# Altium PCB 电子天平.PcbDoc
Units mil, origin at the board's own origin, x right, y up, seen from the top; angles counter-clockwise.
Board outline 6000 x 4000 mil, 2 copper layers (Top Layer, Bottom Layer); 159 components, 109 nets, 516 pads, 0 vias.
Unrouted connection lines stored in the file: 318.
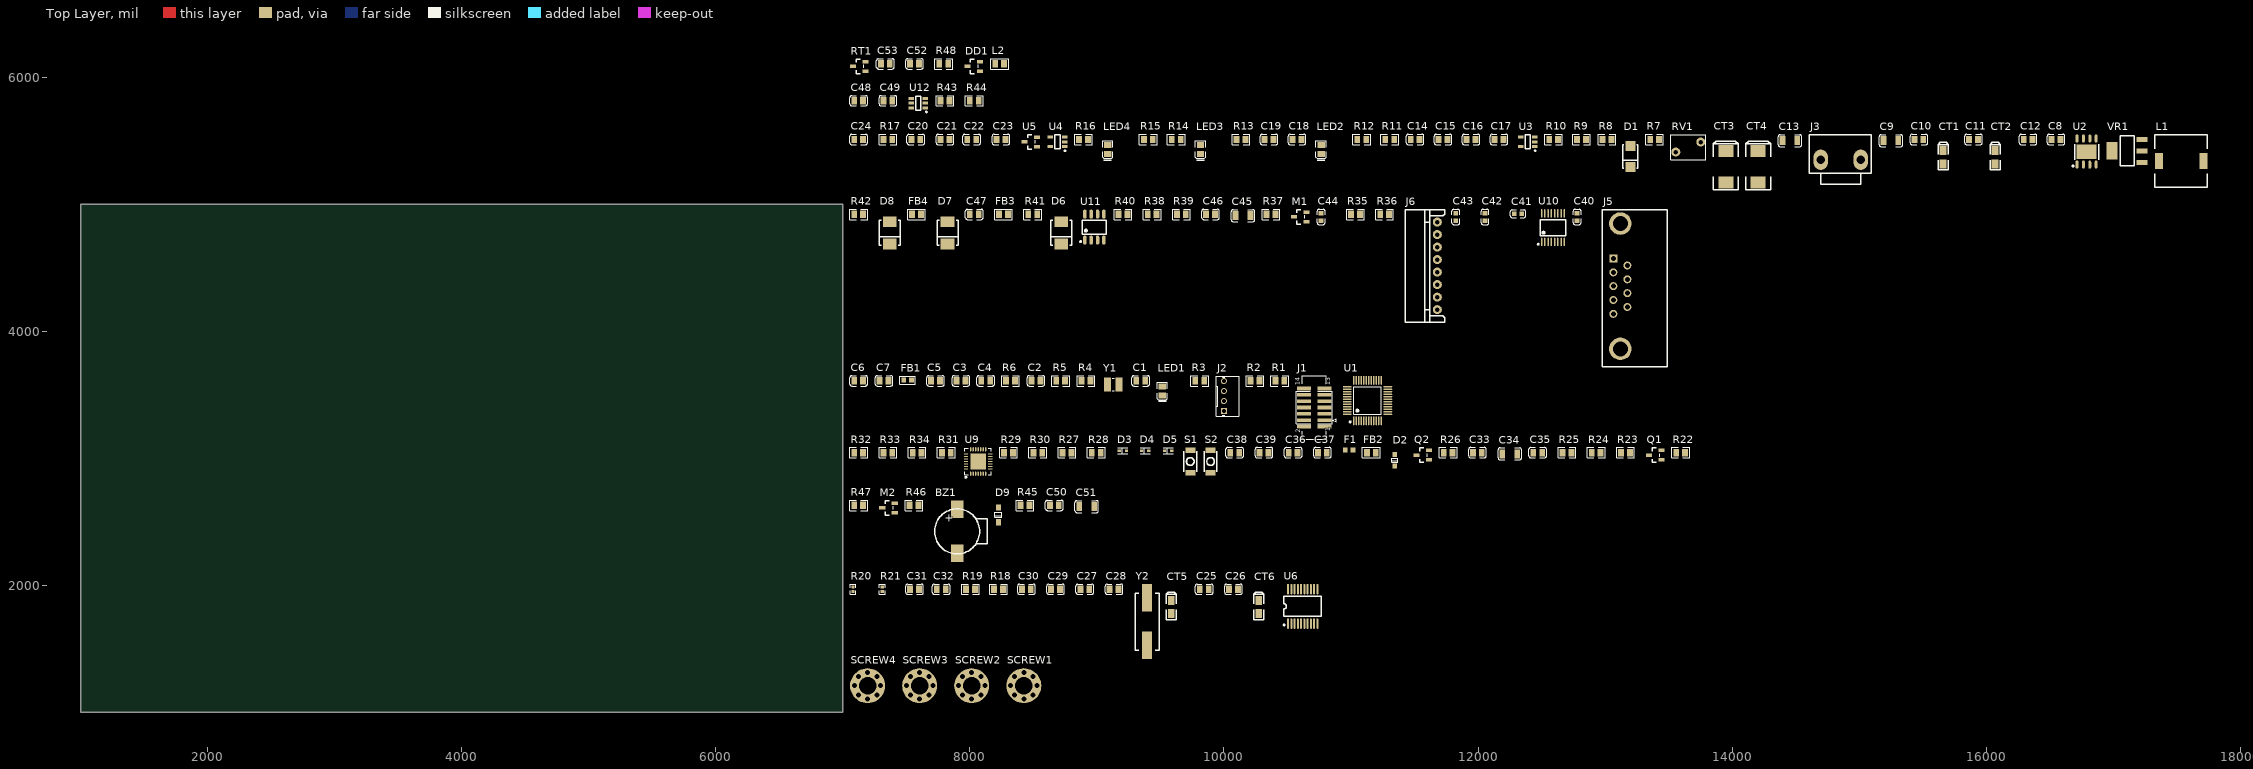
[diagram p0: Top Layer view]
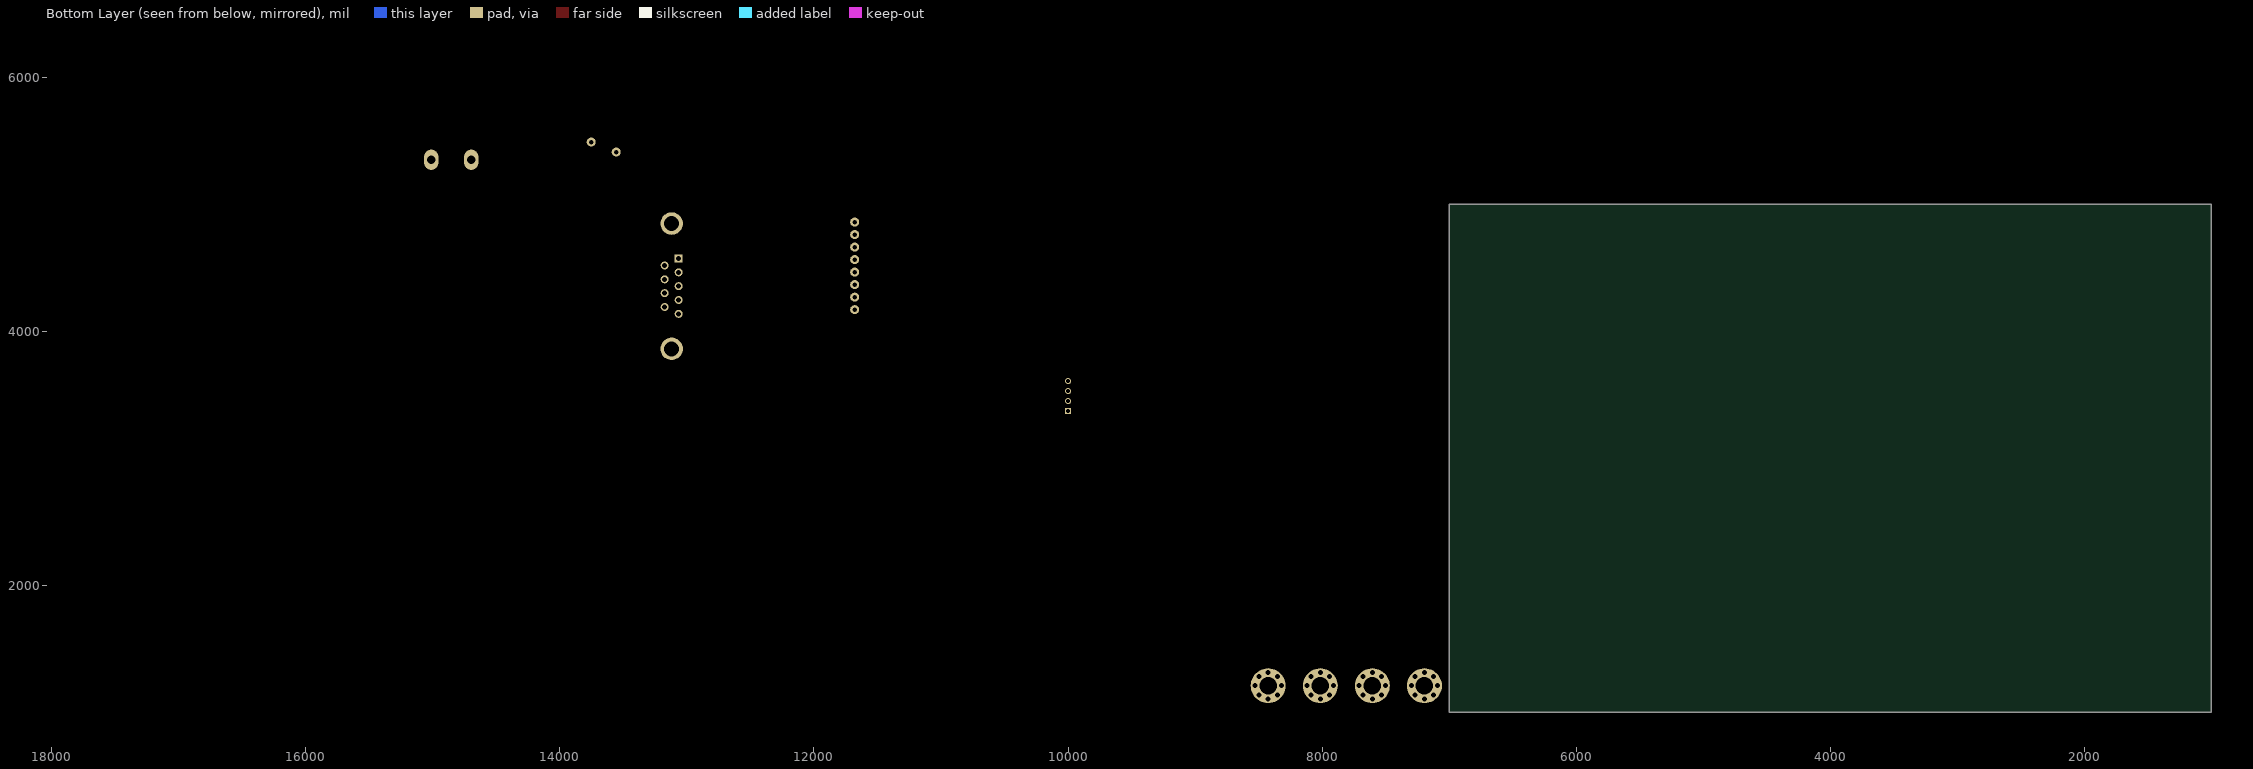
[diagram p1: Bottom Layer view, seen from below]

## Layer stack, top to bottom
Top Layer: signal copper 1.4
Dielectric: dielectric 12.6, FR-4, Dk 4.8
Bottom Layer: signal copper 1.4

## Board outline
1000,1000 7000,1000 7000,5000 1000,5000

## Design rules (kind name [scope] priority, off if disabled: settings)
Clearance Polygon [InPolygon] p1: gap=20
Clearance JLC_Via [IsVia] p2: gap=6
Clearance [All] p3: gap=10
Height [All] p1: minheight=0 maxheight=10000 prefheight=500
HoleSize JLC_HoleSize [All] p1: absolutevalues=TRUE maxlimit=248.03 minlimit=11.81 maxpercent=80.000 minpercent=20.000
MinimumAnnularRing JLC_MinimumAnnularRing [IsVia] p1: minimumring=3
MinimumSolderMaskSliver [All] p1: minsoldermaskwidth=0
PlaneConnect [All] p1: planeconnectstyle=Direct reliefexpansion=20 reliefentries=4 reliefconductorwidth=10 reliefairgap=10
PolygonConnect Via&Fill_Connect [IsVia Or IsFill] p1: connectstyle=Direct reliefconductorwidth=10 reliefentries=4 polygonreliefangle="90 Angle"
PolygonConnect [All] p2: connectstyle=Direct reliefconductorwidth=20 reliefentries=4 polygonreliefangle="90 Angle"
RoomDefinition 温度检测 [InComponentClass('温度检测')] p1: confinementstyle=ConfineIn formatcopy=TRUE lockcomponents=FALSE outline 7045,6015 8315,6015 8315,6255 7045,6255
RoomDefinition 加密芯片 [InComponentClass('加密芯片')] p2: confinementstyle=ConfineIn formatcopy=TRUE lockcomponents=FALSE outline 7045,5710 8150,5710 8150,5965 7045,5965
RoomDefinition 电源 [InComponentClass('电源')] p3: confinementstyle=ConfineIn formatcopy=TRUE lockcomponents=FALSE outline 7045,5085 17755,5085 17755,5660 7045,5660
RoomDefinition RS485&RS232 [InComponentClass('RS485&RS232')] p4: confinementstyle=ConfineIn formatcopy=TRUE lockcomponents=FALSE outline 7045,3710 13500,3710 13500,5070 7045,5070
RoomDefinition MCU [InComponentClass('MCU')] p5: confinementstyle=ConfineIn formatcopy=TRUE lockcomponents=FALSE outline 7045,3140 11335,3140 11335,3760 7045,3760
RoomDefinition ESP32 [InComponentClass('ESP32')] p6: confinementstyle=ConfineIn formatcopy=TRUE lockcomponents=FALSE outline 7045,2830 13710,2830 13710,3195 7045,3195
RoomDefinition Buzzer [InComponentClass('Buzzer')] p7: confinementstyle=ConfineIn formatcopy=TRUE lockcomponents=FALSE outline 7045,2170 9025,2170 9025,2780 7045,2780
RoomDefinition ADC [InComponentClass('ADC')] p8: confinementstyle=ConfineIn formatcopy=TRUE lockcomponents=FALSE outline 7045,1410 10780,1410 10780,2120 7045,2120
RoomDefinition 0_电子天平 [InComponentClass('0_电子天平')] p9: confinementstyle=ConfineIn formatcopy=TRUE lockcomponents=FALSE outline 7045,1060 8630,1060 8630,1460 7045,1460
RoutingVias JLC_RoutingVias [All] p1: holewidth=15.75 width=27.56 viastyle="Through Hole" minholewidth=11.81 minwidth=23.62 maxholewidth=248.03 maxwidth=275.59
ShortCircuit "Solder Bridge" [(InComponentClass('SB'))] p1: allowed=TRUE
ShortCircuit Screw [(InComponentClass('SCREW'))] p2: allowed=TRUE
ShortCircuit [All] p3: allowed=FALSE
SilkToSilkClearance [All] p1: silktosilkclearance=0
SilkscreenOverComponentPads [IsPad] p1: minsilkscreentomaskgap=0
SolderMaskExpansion [All] p1: expansion=4
Width Polygon_width [InPolygon] p1: maxlimit=20 minlimit=6 preferedwidth=10
Width [All] p2: maxlimit=200 minlimit=6 preferedwidth=10
21 further rules are at their usual default settings.

## Classes and differential pairs
component class 温度检测: C52 C53 DD1 L2 R48 RT1
component class 加密芯片: C48 C49 R43 R44 U12
component class 电源: C8 C9 C10 C11 C12 C13 C14 C15 C16 C17 C18 C19 C20 C21 C22 C23 C24 CT1 CT2 CT3 CT4 D1 J3 L1 LED2 LED3 LED4 R7 R8 R9 R10 R11 R12 R13 R14 R15 R16 R17 RV1 U2 U3 U4 U5 VR1
component class RS485&RS232: C40 C41 C42 C43 C44 C45 C46 C47 D6 D7 D8 FB3 FB4 J5 J6 J7 M1 R35 R36 R37 R38 R39 R40 R41 R42 U10 U11
component class MCU: C1 C2 C3 C4 C5 C6 C7 FB1 J1 J2 LED1 R1 R2 R3 R4 R5 R6 U1 Y1
component class ESP32: C33 C34 C35 C36 C37 C38 C39 D2 D3 D4 D5 F1 FB2 Q1 Q2 R22 R23 R24 R25 R26 R27 R28 R29 R30 R31 R32 R33 R34 S1 S2 U7 U8 U9
component class Buzzer: BZ1 C50 C51 D9 M2 R45 R46 R47
component class ADC: C25 C26 C27 C28 C29 C30 C31 C32 CT5 CT6 J4 R18 R19 R20 R21 U6 Y2
component class 0_电子天平: SCREW1 SCREW2 SCREW3 SCREW4

## Components (designator, comment, footprint, x,y, rotation, side; value= is the part's Value field where it differs from the comment)
BZ1 "KLJ-9032-3627" BUZZER_SMD1 7900,2425 r0 top
C1 "15pF ±5% 50V" LC-0805_C 9345,3610 r0 top
C2 "15pF ±5% 50V" LC-0805_C 8520,3610 r0 top
C3 "4.7uF ±10% 25V" LC-0805_C 7930,3610 r0 top
C4 "100nF" LC-0805_C 8125,3610 r0 top
C5 "100nF" LC-0805_C 7730,3610 r0 top
C6 "100nF" LC-0805_C 7125,3610 r0 top
C7 "1uF ±10% 25V" LC-0805_C 7325,3610 r0 top
C8 "10nF" LC-0805_C 16550,5510 r0 top
C9 "10uF ±10% 50V" LC-1206_C 15250,5500 r0 top
C10 "100nF" LC-0805_C 15470,5510 r0 top
C11 "100nF" LC-0805_C 15900,5510 r0 top
C12 "100nF" LC-0805_C 16330,5510 r0 top
C13 "100nF" LC-1206_C 14455,5500 r0 top
C14 "1uF" LC-0805_C 11505,5510 r0 top
C15 "100nF" LC-0805_C 11725,5510 r0 top
C16 "4.7uF" LC-0805_C 11945,5510 r0 top
C17 "100nF" LC-0805_C 12165,5510 r0 top
C18 "100pF" LC-0805_C 10575,5510 r0 top
C19 "100nF" LC-0805_C 10355,5510 r0 top
C20 "1uF" LC-0805_C 7575,5510 r0 top
C21 "100nF" LC-0805_C 7805,5510 r0 top
C22 "4.7uF" LC-0805_C 8015,5510 r0 top
C23 "100nF" LC-0805_C 8245,5510 r0 top
C24 "100pF" LC-0805_C 7125,5510 r0 top
C25 "100nF" LC-0805_C 9845,1970 r0 top
C26 "100nF" LC-0805_C 10075,1970 r0 top
C27 "4.7uF" LC-0805_C 8905,1970 r0 top
C28 "100nF" LC-0805_C 9135,1970 r0 top
C29 "10nF" LC-0805_C 8675,1970 r0 top
C30 "4.7nF" LC-0805_C 8445,1970 r0 top
C31 "10nF" LC-0805_C 7565,1970 r0 top
C32 "22nF" LC-0805_C 7775,1970 r0 top
C33 "100nF" LC-0805_C 11995,3045 r0 top
C34 "22uF" LC-1206_C 12250,3035 r0 top
C35 "100nF" LC-0805_C 12470,3045 r0 top
C36 "100nF" LC-0805_C 10545,3045 r0 top
C37 "NC" LC-0805_C 10775,3045 r0 top
C38 "4.7uF ±10% 25V" LC-0805_C 10085,3045 r0 top
C39 "100nF" LC-0805_C 10315,3045 r0 top
C40 "100nF ±10% 50V" LC-0603_C 12780,4900 r90 top
C41 "100nF ±10% 50V" LC-0603_C 12315,4925 r0 top
C42 "100nF ±10% 50V" LC-0603_C 12055,4900 r90 top
C43 "100nF ±10% 50V" LC-0603_C 11825,4900 r90 top
C44 "100nF ±10% 50V" LC-0603_C 10765,4900 r90 top
C45 "10uF ±10% 50V" LC-1206_C 10150,4910 r0 top
C46 "100nF ±10% 50V" LC-0805_C 9895,4920 r0 top
C47 "4.7nF ±10% 50V" LC-0805_C 8035,4920 r0 top
C48 "100nF" LC-0805_C 7125,5815 r0 top
C49 "10uF" LC-0805_C 7355,5815 r0 top
C50 "100nF" LC-0805_C 8665,2630 r0 top
C51 "10uF" LC-1206_C 8920,2620 r0 top
C52 "100nF" LC-0805_C 7565,6105 r0 top
C53 "100nF" LC-0805_C 7335,6105 r0 top
CT1 "10uF ±10% 16V" LC-CASE-A_3216 15660,5370 r90 top
CT2 "10uF ±10% 16V" LC-CASE-A_3216 16070,5370 r90 top
CT3 "593D157X0010D2TE3" LC-CASE-D_7343 13950,5295 r90 top
CT4 "593D157X0010D2TE3" LC-CASE-D_7343 14205,5295 r90 top
CT5 "10uF" LC-CASE-A_3216 9585,1830 r90 top
CT6 "10uF" LC-CASE-A_3216 10275,1830 r90 top
D1 "B340A-13-F" LC-SMA(DO-214AC)_S1 13200,5375 r90 top
D2 "BAT60JFILM" LC-SOD-323 11345,2985 r90 top
D3 "LESD5D5.0CT1G" LC-SOD-523 9205,3060 r0 top
D4 "LESD5D5.0CT1G" LC-SOD-523 9380,3060 r0 top
D5 "LESD5D5.0CT1G" LC-SOD-523 9560,3060 r0 top
D6 "P6SMB6.8CA" LC-SMB(DO-214AA)_S1 8720,4775 r90 top
D7 "P6SMB6.8CA" LC-SMB(DO-214AA)_S1 7825,4775 r90 top
D8 "P6SMB6.8CA" LC-SMB(DO-214AA)_S1 7370,4775 r90 top
D9 "1N4148W" LC-SOD-123 8225,2555 r90 top
DD1 "BAV99-7-F" LC-SOT-23(SOT-23-3) 8030,6085 r0 top
F1 "MF-FSMF050X-2" LC-0603 10985,3065 r0 top
FB1 "FCM1608KF-601T03" LC-0603_L 7510,3615 r0 top
FB2 "MH2029-300Y" LC-0805_L 11160,3045 r0 top
FB3 "100R/100M" LC-0805_L 8265,4920 r0 top
FB4 "100R/100M" LC-0805_L 7580,4920 r0 top
J1 "STDC14" CON-FTSH-107-01-L-DV-K 10710,3400 r90 top
J2 "SWD" CON-PH2.0-4P-DIP 10000,3490 r90 top
J3 "POWER IN" CON-VH7.92-2P 14855,5350 r0 top
J5 "Printer" CON-DB9_Female 13120,4355 r90 top
J6 "LCD" CON-A2505WR-8P 11680,4515 r90 top
L1 "CDRH104RNP-150NC" L-CDRH104R 17535,5340 r0 top
L2 "MLF2012A1R0JT000" LC-0805_L 8235,6105 r0 top
LED1 "STATUS" LC-0805_LED_S1 9515,3530 r90 top
LED2 "+12V" LC-0805_LED_S1 10765,5430 r90 top
LED3 "+6V" LC-0805_LED_S1 9815,5430 r90 top
LED4 "+3.3V" LC-0805_LED_S1 9085,5430 r90 top
M1 "AO3400A" LC-SOT-23(SOT-23-3) 10600,4900 r0 top
M2 "AO3400A" LC-SOT-23(SOT-23-3) 7360,2610 r0 top
Q1 "SS8050 Y1" LC-SOT-23(SOT-23-3) 13395,3025 r0 top
Q2 "SS8050 Y1" LC-SOT-23(SOT-23-3) 11565,3025 r0 top
R1 "0Ω" LC-0805_R 10440,3610 r0 top
R2 "0Ω" LC-0805_R 10245,3610 r0 top
R3 "4.7KΩ" LC-0805_R 9810,3610 r0 top
R4 "1MΩ" LC-0805_R 8915,3610 r0 top
R5 "10KΩ" LC-0805_R 8715,3610 r0 top
R6 "0Ω" LC-0805_R 8320,3610 r0 top
R7 "100KΩ" LC-0805_R 13390,5510 r0 top
R8 "10KΩ" LC-0805_R 13015,5510 r0 top
R9 "56KΩ" LC-0805_R 12815,5510 r0 top
R10 "2.55KΩ" LC-0805_R 12595,5510 r0 top
R11 "768Ω ±1%" LC-0805_R 11305,5510 r0 top
R12 "4.7KΩ" LC-0805_R 11085,5510 r0 top
R13 "1.37KΩ" LC-0805_R 10135,5510 r0 top
R14 "0Ω" LC-0805_R 9625,5510 r0 top
R15 "470Ω" LC-0805_R 9405,5510 r0 top
R16 "1KΩ" LC-0805_R 8895,5510 r0 top
R17 "1KΩ" LC-0805_R 7355,5510 r0 top
R18 "300Ω" LC-0805_R 8225,1970 r0 top
R19 "300Ω" LC-0805_R 8005,1970 r0 top
R20 "0Ω" LC-0402_R 7080,1970 r90 top
R21 "0Ω" LC-0402_R 7310,1970 r90 top
R22 "10KΩ" LC-0805_R 13595,3045 r0 top
R23 "0Ω" LC-0805_R 13160,3045 r0 top
R24 "10KΩ" LC-0805_R 12930,3045 r0 top
R25 "0Ω" LC-0805_R 12700,3045 r0 top
R26 "10KΩ" LC-0805_R 11765,3045 r0 top
R27 "5.1KΩ" LC-0805_R 8765,3045 r0 top
R28 "5.1KΩ" LC-0805_R 8995,3045 r0 top
R29 "0Ω" LC-0805_R 8305,3045 r0 top
R30 "0Ω" LC-0805_R 8535,3045 r0 top
R31 "22.1KΩ" LC-0805_R 7815,3045 r0 top
R32 "47.5KΩ" LC-0805_R 7125,3045 r0 top
R33 "2KΩ" LC-0805_R 7355,3045 r0 top
R34 "NC" LC-0805_R 7585,3045 r0 top
R35 "10KΩ ±1%" LC-0805_R 11035,4920 r0 top
R36 "10KΩ ±1%" LC-0805_R 11265,4920 r0 top
R37 "10KΩ ±1%" LC-0805_R 10370,4920 r0 top
R38 "10KΩ ±1%" LC-0805_R 9435,4920 r0 top
R39 "10KΩ ±1%" LC-0805_R 9665,4920 r0 top
R40 "4.7KΩ ±1%" LC-0805_R 9205,4920 r0 top
R41 "120Ω ±1%" LC-0805_R 8495,4920 r0 top
R42 "4.7KΩ ±1%" LC-0805_R 7125,4920 r0 top
R43 "4.7KΩ ±1%" LC-0805_R 7805,5815 r0 top
R44 "4.7KΩ ±1%" LC-0805_R 8035,5815 r0 top
R45 "0Ω ±1%" LC-0805_R 8435,2630 r0 top
R46 "10Ω ±1%" LC-0805_R 7560,2630 r0 top
R47 "10KΩ ±1%" LC-0805_R 7125,2630 r0 top
R48 "2.2KΩ" LC-0805_R 7795,6105 r0 top
RT1 "KTY82/220" LC-SOT-23(SOT-23-3) 7130,6085 r0 top
RV1 "V18ZA05P" RV-V18ZA05P 13655,5450 r0 top
S1 "TS342A2P-WZ" SW-REST-KEY 9735,2975 r90 top
S2 "TS342A2P-WZ" SW-REST-KEY 9895,2975 r90 top
SCREW1 "" SCREW_M3 8425,1210 r0 top
SCREW2 "" SCREW_M3 8015,1210 r0 top
SCREW3 "" SCREW_M3 7605,1210 r0 top
SCREW4 "" SCREW_M3 7195,1210 r0 top
U1 "STM32G071CBT6" LC-LQFP-48_7x7x05P 11130,3455 r0 top
U2 "TPS5430DDAR" LC-SOP-8_EP_150mil 16790,5415 r0 top
U3 "AP2210K-5.0TRG1" LC-SOT-23-5 12390,5490 r0 top
U4 "AP2210K-5.0TRG1" LC-SOT-23-5 8690,5490 r0 top
U5 "TLV431BQDBZR" LC-SOT-23(SOT-23-3) 8480,5490 r0 top
U6 "CS5530-ISZR" LC-SSOP-20_208mil 10620,1835 r0 top
U9 "CP2102N-A01-GQFN28R" LC-QFN-28_5x5x05P 8065,2975 r0 top
U10 "SP3232EEY-L/TR" LC-TSSOP-16 12590,4815 r0 top
U11 "SP3485EN-L/TR" LC-SOIC-8_150mil 8980,4820 r0 top
U12 "GEN-FA" LC-SOT-23-6 7595,5795 r0 top
VR1 "AMS1117-3.3" LC-SOT-223 17110,5420 r0 top
Y1 "8MHz" 3225_XT_2P 9130,3580 r0 top
Y2 "49MD-4.9152-20-10-10/B" LC-HC-49SMD 9395,1715 r90 top

## Footprints (in the part's own frame and the unit in brackets; to place one, negate y for a bottom-side part, rotate by r counter-clockwise, add the part's x,y. Pads: shape width x height; smd on the part's side, far side on the other; paste and mask are expansions set on the pad)
3225_XT_2P [mm] "2脚贴片晶振-8MHz"
  rect 1.4x2.8 smd: 1(-1.15,0) 2(1.15,0)
  silkscreen extent -0.2,-1.24 0.2,1.25, body extent -1.75,-1.24 1.75,1.25, height 0.55
BUZZER_SMD1 [mm] "SMD 10.5*9*3.2  侧发声无源蜂鸣器"
  rect 2.5x3.5 smd: 1(0,4.4) 2(0,-4.4)
  silkscreen extent -4.5,-4.5 6,4.5
CON-A2505WR-8P [mm] "间距2.5mm  90°弯针 插件连接器"
  round 1.8 hole 0.9: 1(8.75,0) 2(6.25,0) 3(3.75,0) 4(1.25,0) 5(-1.25,0) 6(-3.75,0) 7(-6.25,0) 8(-8.75,0)
  silkscreen extent -11.25,-1.45 11.25,6.45
CON-DB9_Female [mm] "DB9母头座子"
  rect 1.6x1.6 hole 1: 1(5.537,1.397)
  round 1.6 hole 1: 2(2.769,1.397) 3(0,1.397) 4(-2.769,1.397) 5(-5.537,1.397) 6(4.14,-1.397) 7(1.372,-1.397) 8(-1.397,-1.397) 9(-4.166,-1.397)
  round 4.5 hole 3: 10(-12.522,0) 11(12.522,0)
  silkscreen extent -16.1,-9.37 15.29,3.58
CON-FTSH-107-01-L-DV-K [mm] "STLINK-V3  STDC14调试接口"
  round 0 hole 1.19 unplated mask+0.05: 0(-5.445,0) 0(5.445,0)
  round 0 hole 0.97 unplated mask+0.05: 0(-3.175,0) 0(3.175,0)
  rect 0.74x2.79 smd mask+0.05: 1(-3.81,-2.032) 2(-3.81,2.032) 3(-2.54,-2.032) 4(-2.54,2.032) 5(-1.27,-2.032) 6(-1.27,2.032) 7(0,-2.032) 8(0,2.032) 9(1.27,-2.032) 10(1.27,2.032) 11(2.54,-2.032) 12(2.54,2.032) 13(3.81,-2.032) 14(3.81,2.032)
  silkscreen extent -6.3,-4.38 6.3,3.6
CON-PH2.0-4P-DIP [mm] "插座 1*4P 2mm 直针 插件"
  rect 1.2x1.2 hole 0.8: 1(-3,0)
  round 1.2 hole 0.8: 2(-1,0) 3(1,0) 4(3,0)
  silkscreen extent -4,-3 4,1.5
CON-VH7.92-2P [mil]
  oval 112.5x160 hole 64.96: 1(-157.48,0) 2(157.48,0)
  silkscreen extent -246,-192 241,197
L-CDRH104R [mm] "SMD,  10.5x10.3x4mm,  功率电感"
  rect 1.6x3.2 smd: 1(-4.45,0) 2(4.45,0)
  silkscreen extent -5.25,-5.25 5.25,5.25
LC-0402_R [mm]
  rect 0.6x0.65 smd mask+0.051: 1(-0.425,0) 2(0.425,0)
  silkscreen extent -0.97,-0.58 0.97,0.58, body extent -0.57,-0.27 0.58,0.28, height 0.41
LC-0603 [mm]
  rect 0.93x0.98 smd: 1(-0.77,0) 2(0.77,0)
LC-0603_C [mm]
  rect 0.93x0.98 smd: 1(-0.77,0) 2(0.77,0)
  silkscreen extent -1.53,-0.79 1.54,0.79, body extent -0.8,-0.4 0.8,0.4, height 0.3
LC-0603_L [mm]
  rect 0.93x0.98 smd: 1(-0.77,0) 2(0.77,0)
  silkscreen extent -1.53,-0.79 1.54,0.79, body extent -0.82,-0.41 0.83,0.41, height 0.46
LC-0805_C [mm]
  rect 1.16x1.47 smd: 1(-0.89,0) 2(0.89,0)
  silkscreen extent -1.77,-1.04 1.77,1.04, body extent -1,-0.62 1,0.63, height 0.77
LC-0805_L [mm]
  rect 1.16x1.47 smd: 1(-0.89,0) 2(0.89,0)
  silkscreen extent -1.77,-1.04 1.77,1.03, body extent -1.02,-0.64 1.03,0.64, height 0.6
LC-0805_LED_S1 [mm]
  rect 1.16x1.47 smd: A(0.89,0) K(-0.89,0)
  silkscreen extent -2.24,-1.04 1.77,1.03, body extent -1.01,-0.63 1.01,0.62, height 1.1
LC-0805_R [mm]
  rect 1.16x1.47 smd: 1(-0.89,0) 2(0.89,0)
  silkscreen extent -1.77,-1.04 1.77,1.03, body extent -1,-0.62 1,0.63, height 0.49
LC-1206_C [mm]
  rect 1.13x1.8 smd: 1(-1.49,0) 2(1.49,0)
  silkscreen extent -2.36,-1.2 2.35,1.2, body extent -1.6,-0.81 1.6,0.79, height 1
LC-CASE-A_3216 [mm]
  rect 1.8x1.35 smd: 1(1.31,0) 2(-1.31,0)
  silkscreen extent -2.54,-1 2.97,1, body extent -1.7,-0.84 1.7,0.84, height 1.71
LC-CASE-D_7343 [mm]
  rect 2.4x3 smd: 1(3.12,0) 2(-3.12,0)
  silkscreen extent -4.65,-2.5 5.1,2.5, body extent -3.7,-2.23 3.7,2.22, height 3.01
LC-HC-49SMD [mm]
  rect 5.5x2 smd: 1(-4.75,0) 2(4.75,0)
  silkscreen extent -5.7,-2.4 5.7,2.4, body extent -6.7,-2.46 6.7,2.44, height 4
LC-LQFP-48_7x7x05P [mm]
  oval 0.28x1.8 smd mask+0.051: 1(-2.75,-4.05) 2(-2.25,-4.05) 3(-1.75,-4.05) 4(-1.25,-4.05) 5(-0.75,-4.05) 6(-0.25,-4.05) 7(0.25,-4.05) 8(0.75,-4.05) 9(1.25,-4.05) 10(1.75,-4.05) 11(2.25,-4.05) 12(2.75,-4.05) 25(2.75,4.05) 26(2.25,4.05) 27(1.75,4.05) 28(1.25,4.05) 29(0.75,4.05) 30(0.25,4.05) 31(-0.25,4.05) 32(-0.75,4.05) 33(-1.25,4.05) 34(-1.75,4.05) 35(-2.25,4.05) 36(-2.75,4.05)
  oval 1.8x0.28 smd mask+0.051: 13(4.05,-2.75) 14(4.05,-2.25) 15(4.05,-1.75) 16(4.05,-1.25) 17(4.05,-0.75) 18(4.05,-0.25) 19(4.05,0.25) 20(4.05,0.75) 21(4.05,1.25) 22(4.05,1.75) 23(4.05,2.25) 24(4.05,2.75) 37(-4.05,2.75) 38(-4.05,2.25) 39(-4.05,1.75) 40(-4.05,1.25) 41(-4.05,0.75) 42(-4.05,0.25) 43(-4.05,-0.25) 44(-4.05,-0.75) 45(-4.05,-1.25) 46(-4.05,-1.75) 47(-4.05,-2.25) 48(-4.05,-2.75)
  silkscreen extent -3.6,-4.42 2.75,2.75
LC-QFN-28_5x5x05P [mm]
  rect 3.13x3.13 smd mask+0.051: 0(0,0)
  oval 0.28x0.85 smd mask+0.051: 1(-1.5,-2.425) 2(-1,-2.425) 3(-0.5,-2.425) 4(0,-2.425) 5(0.5,-2.425) 6(1,-2.425) 7(1.5,-2.425) 15(1.5,2.425) 16(1,2.425) 17(0.5,2.425) 18(0,2.425) 19(-0.5,2.425) 20(-1,2.425) 21(-1.5,2.425)
  oval 0.85x0.28 smd mask+0.051: 8(2.425,-1.5) 9(2.425,-1) 10(2.425,-0.5) 11(2.425,0) 12(2.425,0.5) 13(2.425,1) 14(2.425,1.5) 22(-2.425,1.5) 23(-2.425,1) 24(-2.425,0.5) 25(-2.425,0) 26(-2.425,-0.5) 27(-2.425,-1) 28(-2.425,-1.5)
  silkscreen extent -2.65,-3.3 2.65,2.65
LC-SMA(DO-214AC)_S1 [mm]
  rect 2x2 smd: 1(2.1,0) 2(-2.1,0)
  silkscreen extent -2.35,-1.5 2.35,1.5
LC-SMB(DO-214AA)_S1 [mil]
  rect 85x107.99 smd: 1(87.01,0) 2(-87.01,0)
  silkscreen extent -98,-83 98,83
LC-SOD-123 [mm]
  rect 1.25x1 smd: 1(1.475,0) 2(-1.475,0)
  silkscreen extent -0.5,-0.7 0.5,0.7, body extent -1.85,-0.77 1.85,0.78, height 1.35
LC-SOD-323 [mm]
  rect 1x0.83 smd: 1(1.18,0) 2(-1.18,0)
  silkscreen extent -0.4,-0.6 0.4,0.6, body extent -1.35,-0.63 1.35,0.63, height 1.1
LC-SOD-523 [mm]
  rect 0.64x0.5 smd: 1(0.73,0) 2(-0.73,0)
  silkscreen extent -1,-0.6 1,0.6, body extent -0.8,-0.4 0.8,0.4, height 0.7
LC-SOIC-8_150mil [mm]
  oval 0.7x1.8 smd: 1(-1.905,-2.6) 2(-0.635,-2.6) 3(0.635,-2.6) 4(1.905,-2.6) 5(1.905,2.6) 6(0.635,2.6) 7(-0.635,2.6) 8(-1.905,2.6)
  silkscreen extent -2.9,-3.05 2.4,1.4
LC-SOP-8_EP_150mil [mm]
  rect 4x2.9 smd: 0(0,0)
  oval 0.6x1.6 smd: 1(-1.905,-2.6) 2(-0.635,-2.6) 3(0.635,-2.6) 4(1.905,-2.6) 5(1.905,2.6) 6(0.635,2.6) 7(-0.635,2.6) 8(-1.905,2.6)
  silkscreen extent -2.85,-3.05 2.4,1.5
LC-SOT-23(SOT-23-3) [mm]
  rect 1.25x0.7 smd: 1(1.25,-0.95) 2(1.25,0.95) 3(-1.25,0)
  silkscreen extent -0.65,-1.46 0.9,1.46, body extent -1.5,-1.5 1.5,1.5, height 1.3
LC-SOT-23-5 [mm]
  rect 1.1x0.6 smd: 1(1.4,-0.95) 2(1.4,0) 3(1.4,0.95) 4(-1.4,0.95) 5(-1.4,-0.95)
  silkscreen extent -0.5,-1.87 1.63,1.4
LC-SOT-23-6 [mm]
  rect 1.1x0.6 smd: 1(1.4,-0.95) 2(1.4,0) 3(1.4,0.95) 4(-1.4,0.95) 5(-1.4,0) 6(-1.4,-0.95)
  silkscreen extent -0.5,-1.87 1.73,1.4
LC-SOT-223 [mm]
  rect 2.2x1 smd: 1(3,-2.3) 2(3,0) 3(3,2.3)
  rect 2.2x3.5 smd: 2(-3,0)
  silkscreen extent -1.4,-3 1.4,3, body extent -3.49,-3.24 3.49,3.24, height 1.64
LC-SSOP-20_208mil [mm]
  oval 0.4x2.1 smd mask+0.051: 1(-2.925,-3.45) 2(-2.275,-3.45) 3(-1.625,-3.45) 4(-0.975,-3.45) 5(-0.325,-3.45) 6(0.325,-3.45) 7(0.975,-3.45) 8(1.625,-3.45) 9(2.275,-3.45) 10(2.925,-3.45) 11(2.925,3.45) 12(2.275,3.45) 13(1.625,3.45) 14(0.975,3.45) 15(0.325,3.45) 16(-0.325,3.45) 17(-0.975,3.45) 18(-1.625,3.45) 19(-2.275,3.45) 20(-2.925,3.45)
  silkscreen extent -3.85,-3.86 3.75,2
LC-TSSOP-16 [mm]
  oval 0.32x1.7 smd: 1(-2.275,-2.85) 2(-1.625,-2.85) 3(-0.975,-2.85) 4(-0.325,-2.85) 5(0.325,-2.85) 6(0.975,-2.85) 7(1.625,-2.85) 8(2.275,-2.85) 9(2.275,2.85) 10(1.625,2.85) 11(0.975,2.85) 12(0.325,2.85) 13(-0.325,2.85) 14(-0.975,2.85) 15(-1.625,2.85) 16(-2.275,2.85)
  silkscreen extent -3.1,-3.45 2.55,1.6
RV-V18ZA05P [mm] "压敏电阻 5mm Size"
  round 1.8 hole 0.9: 1(-2.5,-1) 2(2.5,1)
  silkscreen extent -3.5,-2.5 3.5,2.5
SCREW_M3 [mm] "M3螺丝孔"
  round 1 hole 1: 0(-2.625,0) 0(-1.856,-1.856) 0(-1.856,1.856) 0(0,-2.625) 0(0,2.625) 0(1.856,-1.856) 0(1.856,1.856) 0(2.625,0)
  round 7 hole 3.5 unplated: 0(0,0)
SW-REST-KEY [mm] "复位按钮"
  rect 1.05x2 smd: 1(-2.225,0) 2(2.225,0)
  silkscreen extent -2.03,-1.27 2.03,1.27

## Part data
BZ1: library part Speaker, "额定电压3.6V  谐振频率2731Hz  线圈电阻16Ω"
C1 C2: library part Cap, "MLCC NP0"
C3 C4 C5 C6 C7 C8 C9 C10 C11 C12 C13 C14 C15 C16 C17 C18 C19 C20 C21 C22 C23 C24 C25 C26 C27 C28 C29 C30 C31 C32 C33 C34 C35 C38 C39 C40 C41 C42 C43 C44 C45 C46 C47 C48 C49 C50 C51 C52 C53: library part Cap, "MLCC"
C36 C37: library part Cap, "Capacitor-0.1uF±10%/50V"
CT1 CT2 CT3 CT4 CT5 CT6: library part "Cap Pol1", "钽电容"
D1: library part "D Schottky", "肖特基二极管"
D2: library part "D Schottky", "Schottky Diode"
D3 D4 D5: library part "SMB/DO-214AA P6SMB6.8CA", "ESD二极管"
D6 D7 D8: library part "SMB/DO-214AA P6SMB6.8CA", "TVS"
D9: library part DIODE, "100V，150mA，VF=1.25V@150mA"
DD1: library part "SOT-23 BAV99 A7W", "开关二极管"
F1: library part "Fuse Thermal", "自恢复保险丝"
FB1 FB2 FB3 FB4: library part FB, "磁珠"
J1: library part "Header 7X2", "Header, 7-Pin, Dual row"
J2: library part SIP4
J3: library part "Header 2", "Header, 2-Pin"
J5: library part "D Connector 9", "Receptacle Assembly, 9 Position, Right Angle"
J6: library part "Header 8H", "Header, 8-Pin, Right Angle"
L1: library part "Inductor Iron", "Magnetic-Core Inductor"
L2: library part Inductor, "贴片电感"
LED1: library part 0603, "LED"
LED2 LED3 LED4: library part "0805 翠绿", "发光二极管"
M1 M2: library part "AO3400A N道沟 X0YV1T SOT-23", "MOS(场效应管)"
Q1 Q2: library part "SOT-23 SS8050 Y1", "三极管"
R1 R2 R3 R4 R5 R6 R7 R8 R9 R10 R11 R18 R19 R20 R21 R22 R23 R24 R25 R26 R27 R28 R29 R30 R31 R32 R33 R34 R35 R36 R37 R38 R39 R40 R41 R42 R43 R44 R45 R46 R47: library part Res2, "Resistor"
R12 R13 R15: library part "0805 47KΩ (4702) 1%", "贴片电阻"
R14 R16 R17 R48: library part "0805 470KΩ (4703) 1%", "贴片电阻"
RT1: library part "Res Thermal", "Thermistor"
RV1: library part "Res Varistor", "Varistor (Voltage-Sensitive Resistor)"
S1 S2: library part SW, "Tact Switch"
SCREW1 SCREW2 SCREW3 SCREW4: library part SCREW, "M3 螺丝孔/定位孔"
U1: library part STM32G081CBT6, "128KB Flash, 36KB RAM, 4USART,timers,ADC,DAC,comm. I/Fs,AES-256,1.65-3.6V"
U2: "5.5V to 36V Input, 3A, Step-Down DC-DC"
U3 U4: library part SPX3819M5-L-5-0/TR, "5.0V固定输出，低压差700mV@Iout=500mA，Vin=16V"
U5: library part "CJ431 0.5%431", "电压基准"
U6: library part CS5530, "24bits模数转换芯片"
U9: "USBоƬ"
U10: library part MAX232AESE, "+5V-Powered, Multichannel RS-232 Driver/Receiver"
U11: library part SP3485EN, "RS485"
U12: library part ALPU-FA, "neowine加密芯片  带32Kbits EEPROM。"
VR1: library part "SOT-223 AMS1117-3.3", "低压差线性稳压(LDO)"
Y1: library part "SMD-5032_2P 8MHz 20ppm 2", "SMD 8MHz"
Y2: library part "SMD-5032_2P 11.0592MHZ 20PF 20PPM", "贴片无源晶振"

## Nets (pads, with @x,y where several pads share a name; then routed paths per layer and width w, separated by ;. In a path a pad name is that pad's centre, name@x,y a point inside that pad or via, vN(x,y) a via of type N, cw(c..) or ccw(c..) an arc to the next point about the centre after c; other vN are vias at no path point)
485_A: FB3.1
485_B: FB4.1
+3.3V: C3.1 C4.1 C12.1 C26.1 C34.1 C35.1 C38.1 C39.1 C40.2 C45.2 C46.1 C48.1 C49.1 C50.1 C51.1 C52.2 CT2.1 CT6.1 DD1.2 FB1.1 J1.3 J2.1 L2.2 LED4.A R5.2 R6.1 R24.2 R33.1 R35.1 R36.1 R38.1 R39.1 R40.2 R43.1 R44.1 R45.2 U1.6 U6.15 U9.6 U9.7 U10.16 U11.8 U12.6 VR1.2
+5V: D2.2
+5V_E+: C22.1 C23.1 R11.1 U4.5
+5V_VA: C16.1 C17.1 C25.1 CT5.1 U3.5 U6.5
+6V: C11.1 C13.1 C14.1 C15.1 C20.1 C21.1 CT1.1 CT3.1 CT4.1 L1.2 LED3.A R8.1 U3.1 U3.3 U4.1 U4.3 VR1.3
+12V: C9.1 C10.1 J3.1 LED2.A R7.2 RV1.2 U2.7
+VREF: C19.2 C27.1 C28.1 R11.2 R14.2 U5.2 U6.18
ACTIVE: R34.2 U9.11
ADC_TEMP: C53.2 DD1.3 R48.1 RT1.2 U1.17
AGND: C19.1 C25.2 C27.2 C28.2 C29.2 C31.1 CT5.2 R17.2 R20.2 U5.3 U6.6 U6.17
CTS: J5.7
D+: D4.2 U9.4
D-: D5.2 U9.5
DCD: J5.1
DGND: C26.2 CT6.2 R20.1 R21.2 U6.16 U6.19 U6.20
DSR: J5.4
DTR: J5.6
EN: C33.1 C36.1 Q1.3 R24.1 S1.2
GND: C1.1 C2.1 C3.2 C4.2 C5.2 C6.2 C7.2 C9.2 C10.2 C11.2 C12.2 C13.2 C14.2 C15.2 C16.2 C17.2 C18.2 C20.2 C21.2 C22.2 C23.2 C24.2 C33.2 C34.2 C35.2 C36.2 C37.2 C38.2 C39.2 C40.1 C42.2 C44.2 C45.1 C46.2 C48.2 C49.2 C50.2 C51.2 C52.1 C53.1 CT1.2 CT2.2 CT3.2 CT4.2 D1.1 D3.1 D4.1 D5.1 D6.1 D8.1 DD1.1 J1.5 J1.7 J1.11 J2.4 J3.2 J5.5 J5.10 J5.11 M1.2 M2.2 R3.2 R9.1 R10.2 R12.1 R13.1 R15.1 R21.1 R27.2 R28.2 R32.1 R34.1 R37.2 R42.1 R47.2 RT1.1 RV1.1 S1.1 S2.1 U1.7 U2.0 U2.6 U3.2 U4.2 U9.3 U10.15 U11.5 U12.2 VR1.1
IO0: C37.1 Q2.3 S2.2
LCD_EN: M1.1 R37.1 U1.15
LCD_V-: J6.7 J6.8 M1.3
LED_DEBUG: LED1.A U1.34
NetBZ1_1: BZ1.1 R45.1
NetBZ1_2: BZ1.2 M2.3
NetC8_1: C8.1 U2.1
NetC8_2: C8.2 D1.2 L1.1 U2.8
NetC18_1: C18.1 U3.4
NetC24_1: C24.1 U4.4
NetC29_1: C29.1 C30.2 R18.1 U6.2
NetC30_1: C30.1 C31.2 R19.1 U6.1
NetC32_1: C32.1 U6.4
NetC32_2: C32.2 U6.3
NetC41_1: C41.1 U10.3
NetC41_2: C41.2 U10.1
NetC42_1: C42.1 U10.2
NetC43_1: C43.1 U10.5
NetC43_2: C43.2 U10.4
NetC44_1: C44.1 U10.6
NetC47_1: C47.1 D7.2 D8.2 FB4.2 R41.1 R42.2 U11.7
NetC47_2: C47.2 D6.2 D7.1 FB3.2 R40.1 R41.2 U11.6
NetD2_1: D2.1 FB2.2 R31.1
NetD3_2: D3.2 F1.2
NetF1_1: F1.1 FB2.1
NetJ8_A5: R28.1
NetJ8_B5: R27.1
NetL2_1: L2.1 R48.2
NetLED1_K: LED1.K R3.1
NetLED2_K: LED2.K R12.2
NetLED3_K: LED3.K R13.2
NetLED4_K: LED4.K R15.2
NetM2_1: M2.1 R46.1 R47.1
NetQ1_1: Q1.1 R22.1
NetQ1_2: Q1.2 R26.2 U9.24
NetQ2_1: Q2.1 R26.1
NetQ2_2: Q2.2 R22.2 U9.28
NetR6_2: R6.2 U1.4
NetR7_1: R7.1 R9.2 U2.5
NetR8_2: R8.2 R10.1 U2.4
NetR14_1: R14.1 R16.2
NetR16_1: R16.1 R17.1 U5.1
NetR23_2: R23.2 U9.26
NetR25_2: R25.2 U9.25
NetR31_2: R31.2 R32.2 U9.8
NetR33_2: R33.2 U9.9
NetU6_9: U6.9 Y2.2
NetU6_10: U6.10 Y2.1
OSC_IN: C1.2 R4.2 U1.8 Y1.2
OSC_OUT: C2.2 R4.1 U1.9 Y1.1
PWM_BUZ: R46.2 U1.28
RI: J5.9
RS232-RX-IN: J6.4 U10.8
RS232-TX-OUT: J6.5 J6.6 U10.7
RTS: J5.8
RXD: J5.3 U10.13
RXD0: R23.1
RXD2: R29.1
S+: R19.2
S-: R18.2
SCL: R44.2 U1.47 U12.3
SDA: R43.2 U1.48 U12.4
SPI1_CS: U1.45 U6.14
SPI1_MISO: U1.43 U6.12
SPI1_MOSI: U1.44 U6.13
SPI1_SCLK: U1.42 U6.11
T_JCLK/T_SWCLK: J1.6 J2.3 U1.36
T_JRCLK/NC: J1.9
T_JTDI/NC: J1.10
T_JTDO/T_SWO: J1.8
T_JTMS/T_SWDIO: J1.4 J2.2 U1.35
T_NRST: C5.1 J1.12 R5.1 U1.10
T_VCP_RX: J1.13 R2.2
T_VCP_TX: J1.14 R1.2
TXD: J5.2 U10.14
TXD0: R25.1
TXD2: R30.1
USART1_RX: R2.1 R30.2 U1.32
USART1_TX: R1.1 R29.2 U1.29
USART2_RX: R35.2 U1.14 U10.9
USART2_TX: R36.2 U1.13 U10.10
USART3_DE: U1.20 U11.2 U11.3
USART3_RX: R39.2 U1.23 U11.1
USART3_TX: R38.2 U1.22 U11.4
USART4_RX: U1.12 U10.12
USART4_TX: U1.11 U10.11
VCC: J6.1 J6.2
VREF: C6.1 C7.1 FB1.2 U1.5
pads on no net: D9.1 D9.2 J1.0 J1.1 J1.2 J6.3 RT1.3 SCREW1.0 SCREW2.0 SCREW3.0 SCREW4.0 U1.1 U1.2 U1.3 U1.16 U1.18 U1.19 U1.21 U1.24 U1.25 U1.26 U1.27 U1.30 U1.31 U1.33 U1.37 U1.38 U1.39 U1.40 U1.41 U1.46 U2.2 U2.3 U6.7 U6.8 U9.0 U9.1 U9.2 U9.10 U9.12 U9.13 U9.14 U9.15 U9.16 U9.17 U9.18 U9.19 U9.20 U9.21 U9.22 U9.23 U9.27 U12.1 U12.5

## Text inside footprints (layer, text, board x,y; h text height)
BZ1: Top Overlay "+" at 7803,2502 h60
J1: Top Overlay "14" at 10609.61,3573.23 h59.06 r90; Top Overlay "13" at 10847.8,3573.23 h59.06 r90; Top Overlay "2" at 10610.59,3202.17 h59.06 r90; Top Overlay "1" at 10848.78,3213.98 h59.06 r90